# Altium PCB develer_2L_Ax_panel.PcbDoc
Units mm, origin at the board's own origin, x right, y up, seen from the top; angles counter-clockwise.
Board outline 129 x 103 mm, 6 copper layers (Top Layer, GND, Inner, Inner2, Power, Bottom Layer), stack 0.815 mm thick; 6 components, 77 nets, 10 pads, 0 vias.
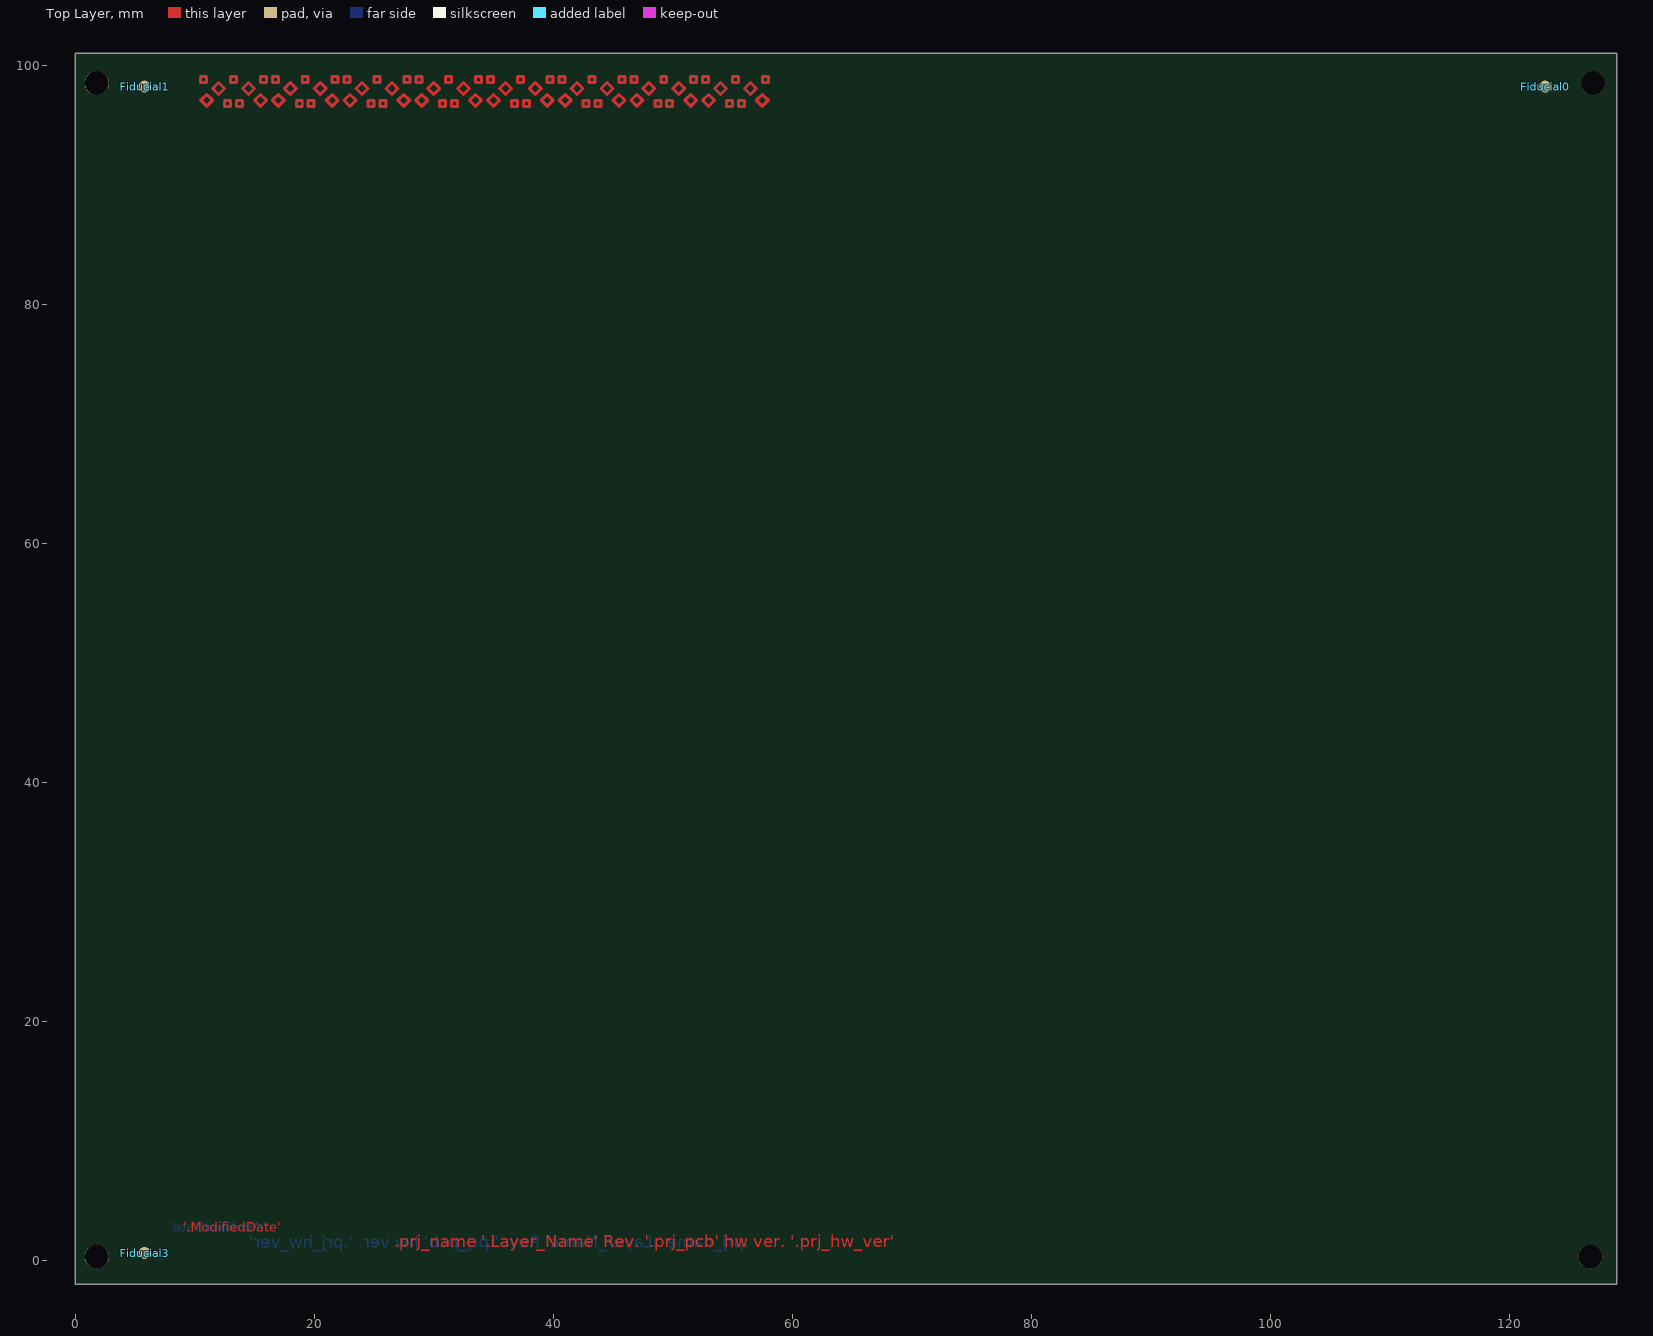
[diagram p0: Top Layer view]
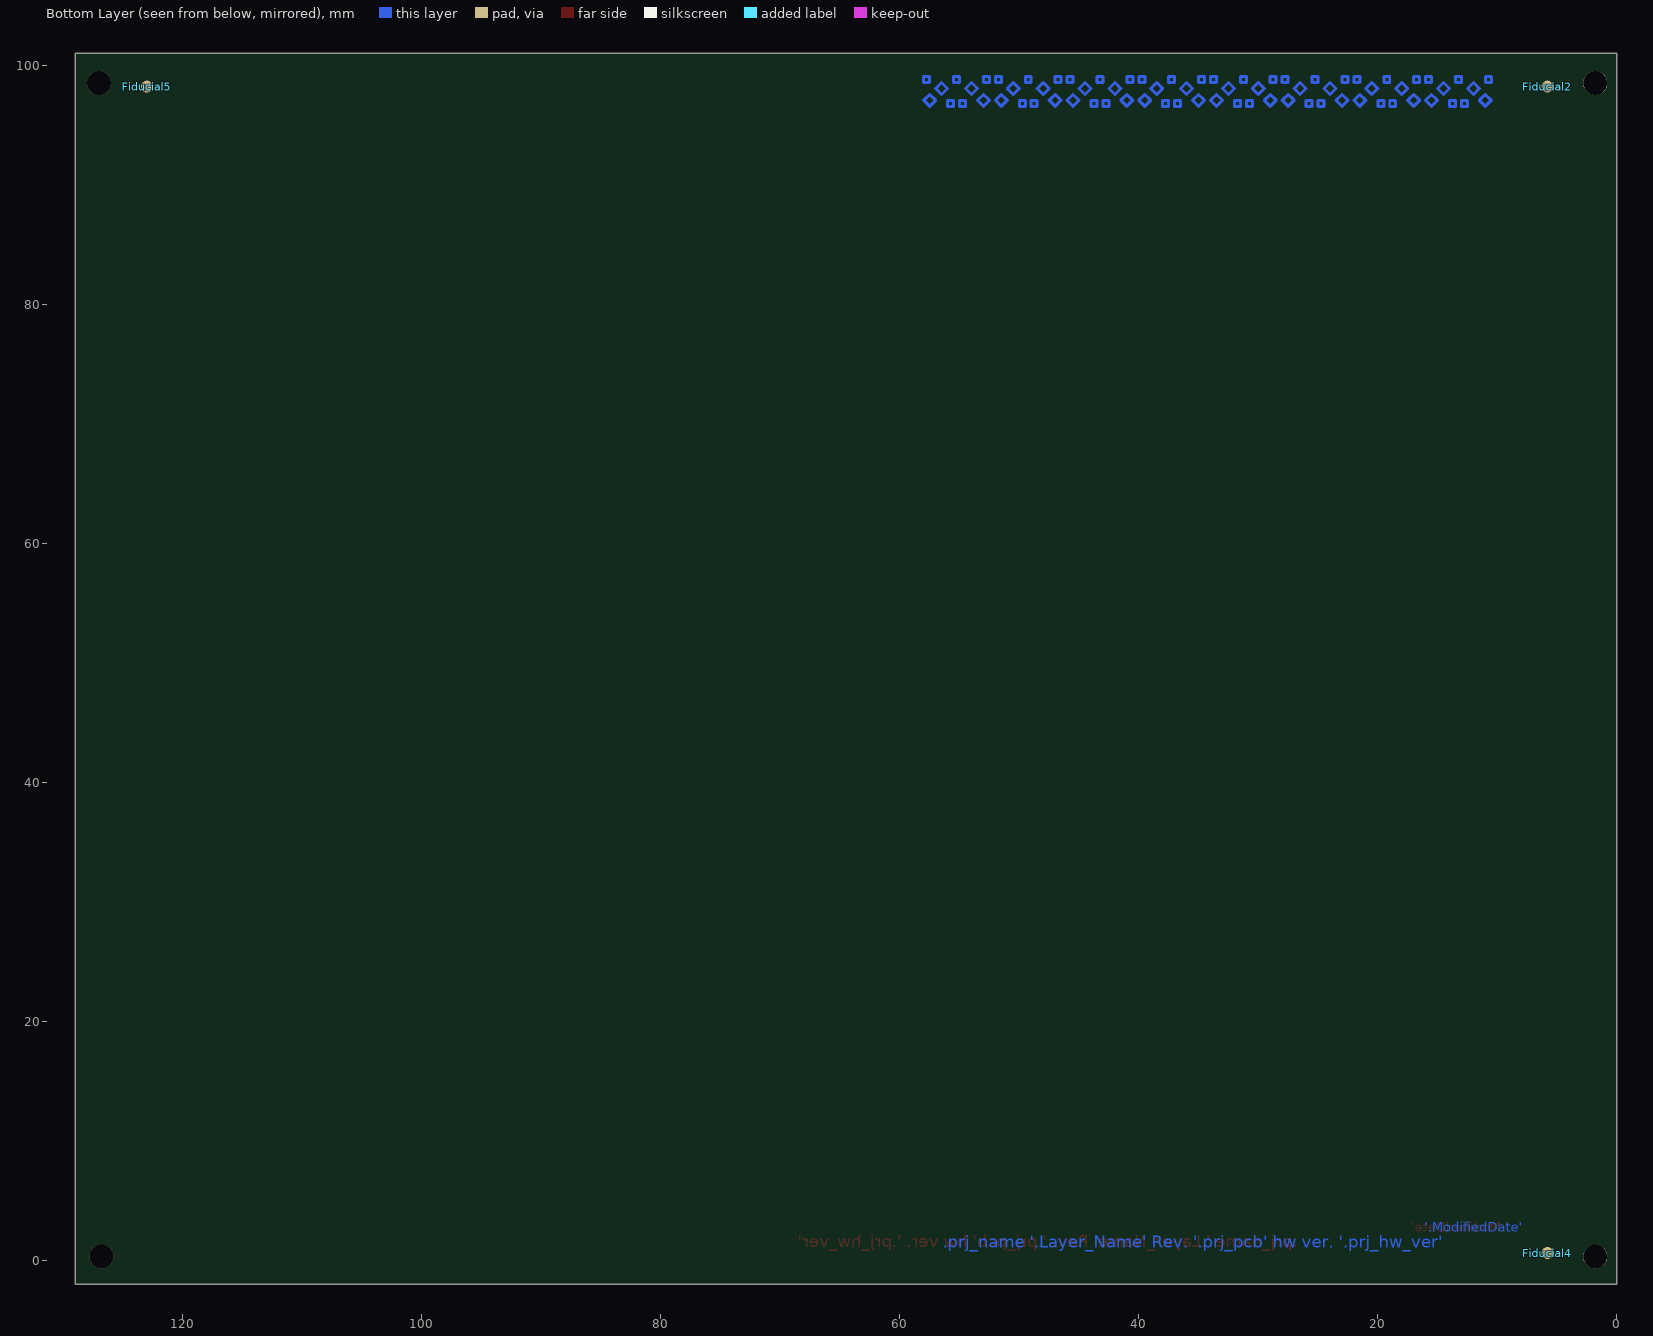
[diagram p1: Bottom Layer view, seen from below]
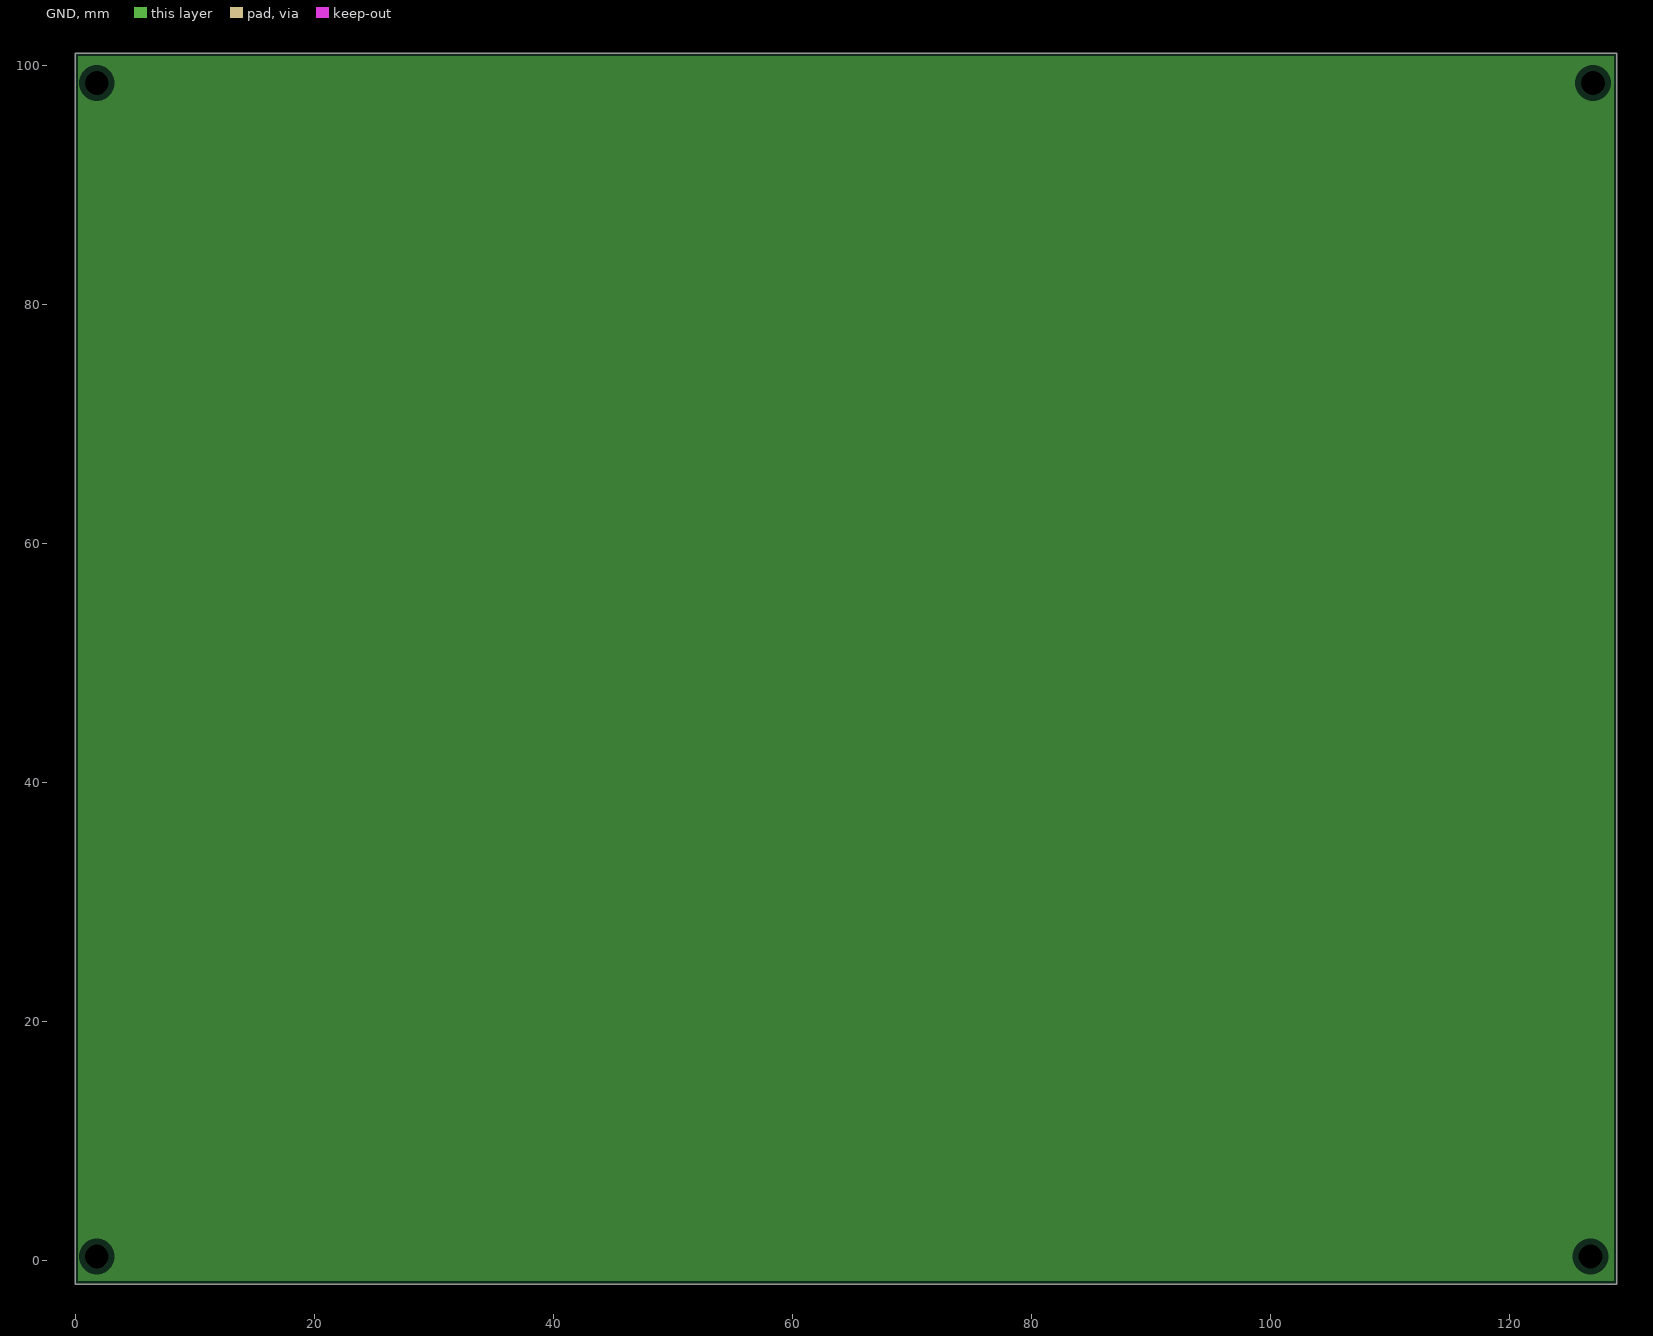
[diagram p2: GND, clearances drawn from the general rule]
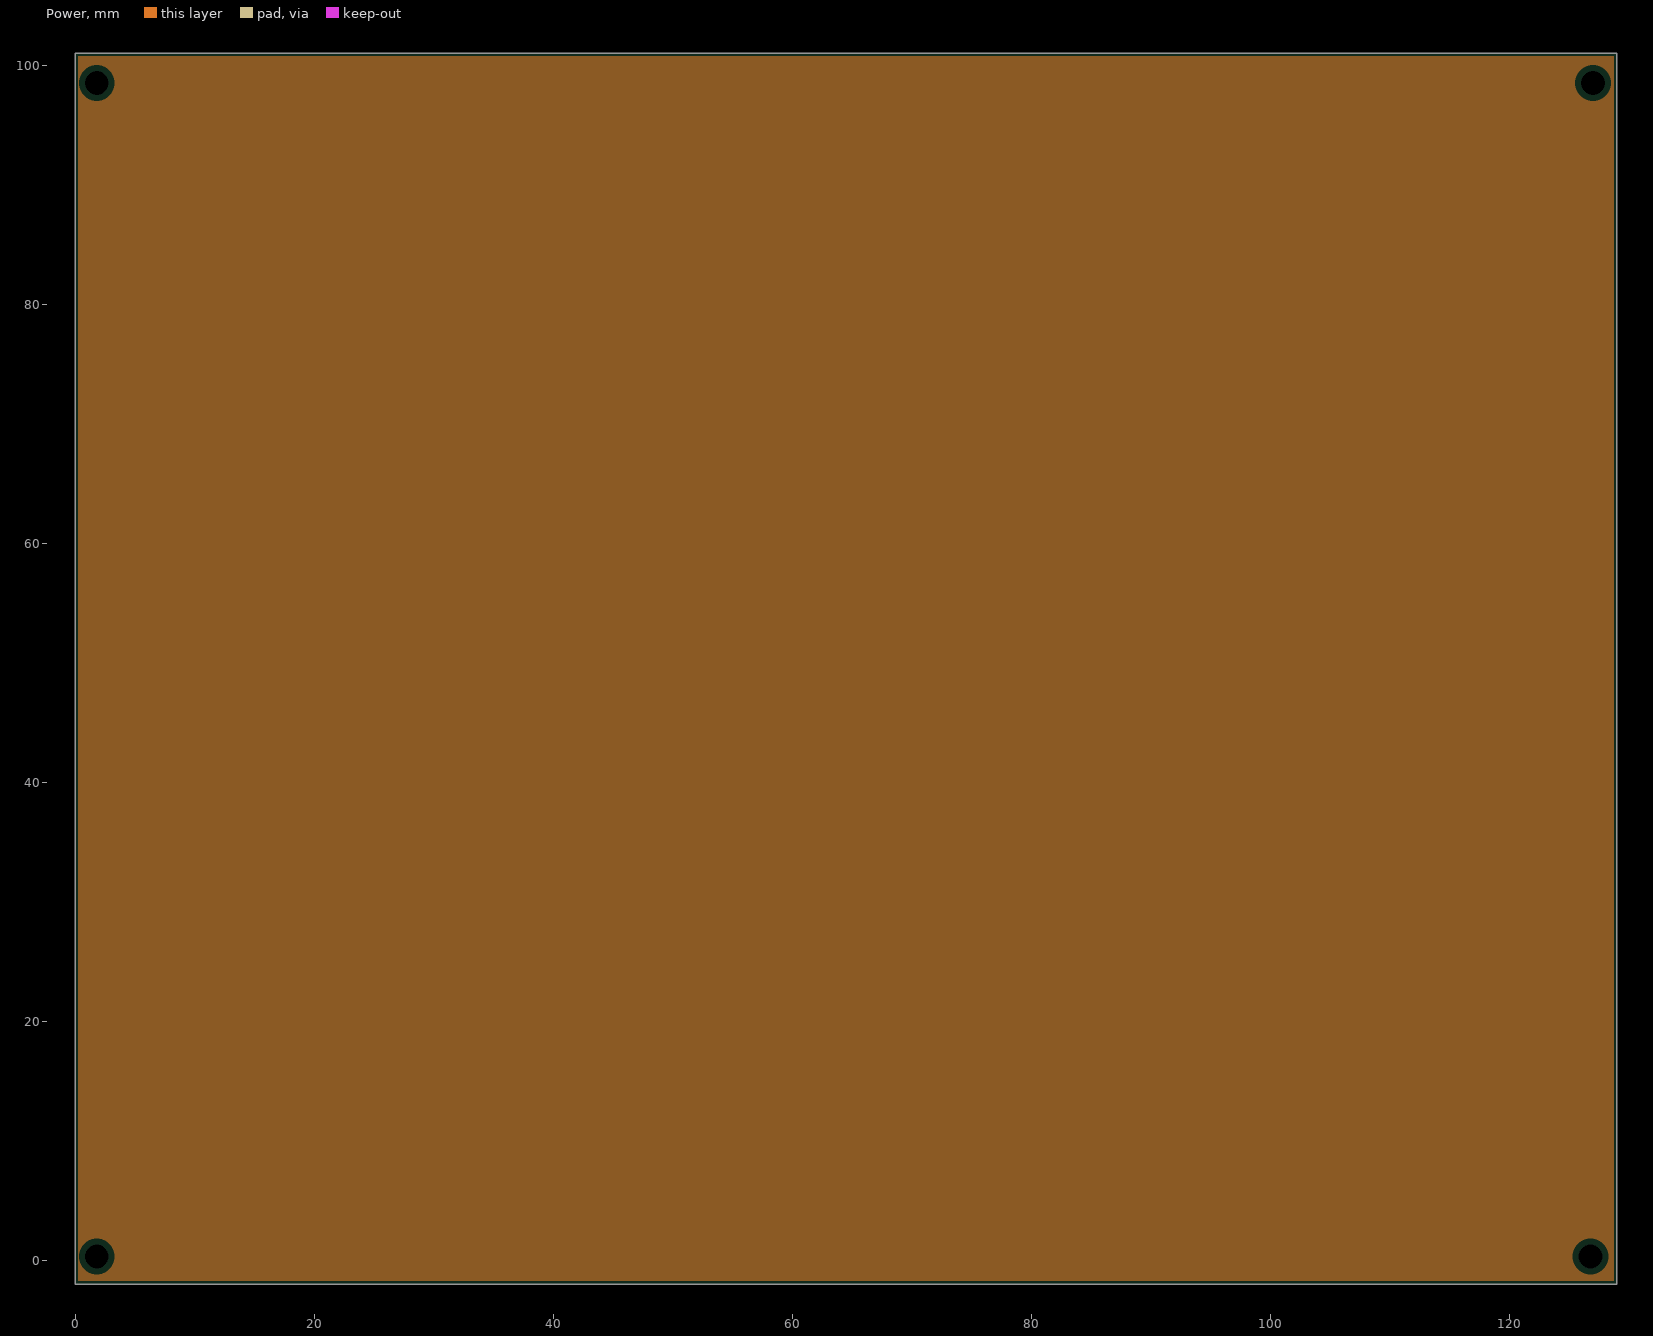
[diagram p3: Power, clearances drawn from the general rule]

## Layer stack, top to bottom
Top Solder: solder mask 0.0102, Solder Resist, Dk 3.5
Top Layer: signal copper 0.035
Dielectric1: prepreg 0.1042, IT180A 3310, Dk 4.15
GND: plane copper 0.018, net (Multiple Nets)
Dielectric5: core 0.13, IT180A FR-4, Dk 4.25
Inner: signal copper 0.018
Dielectric3: prepreg 0.2043, IT180A 3310, Dk 4.15
Inner2: signal copper 0.018
Dielectric2: core 0.13, IT180A FR-4, Dk 4.25
Power: plane copper 0.018, net (Multiple Nets)
Dielectric4: prepreg 0.1042, IT180A 3310, Dk 4.15
Bottom Layer: signal copper 0.035
Bottom Solder: solder mask 0.0102, Solder Resist, Dk 3.5

## Board outline
0,-2 0,101 129,101 129,-2

## Design rules (kind name [scope] priority, off if disabled: settings)
Clearance Clearance_eth_hole [(ObjectKind = 'Pad') And ((Name = 'J1-MH1') or (Name = 'J1-MH2'))] p1: gap=0 ignorepadtopadclearanceinfootprint=FALSE
Clearance Clearance_shld [InNet('SHLD') and InPolygon] p2: gap=0.9 ignorepadtopadclearanceinfootprint=FALSE
Clearance Clearance_gnd_planes [InPolygon and InNet('GND')] p3: gap=0.45 ignorepadtopadclearanceinfootprint=FALSE
Clearance Clearance_poe_vin [InNetClass('poe_vin') vs InPolygon] p4: gap=0.85 ignorepadtopadclearanceinfootprint=FALSE
Clearance Clearance_015 [InComponentClass('015')] p5: gap=0.15 ignorepadtopadclearanceinfootprint=FALSE
Clearance Clearance_diff_eth [InDifferentialPairClass('eth') vs not OnLayer('Keep-Out Layer')] p6: gap=0.35 ignorepadtopadclearanceinfootprint=FALSE except(0.45: Arc-Fill Arc-Poly Arc-Region Track-Fill Track-Poly Track-Region SMDPad-Fill SMDPad-Poly SMDPad-Region THPad-Fill THPad-Poly THPad-Region Via-Fill Via-Poly Via-Region Fill-Fill Fill-Poly Fill-Region Poly-Poly Poly-Region Region-Region)
Clearance Clearance_diff_eth_same [InDifferentialPairClass('eth')] p7: gap=0.15 ignorepadtopadclearanceinfootprint=FALSE
Clearance Clearance_diff_usb_same [InDifferentialPairClass('usb')] p8: gap=0.2 ignorepadtopadclearanceinfootprint=FALSE
Clearance [All vs not InAnyDifferentialPair] p9: gap=0.25 ignorepadtopadclearanceinfootprint=FALSE
ComponentClearance ComponentClearance_con [InComponent('J2') vs InComponent('J3')] p1: gap=0 collisioncheckmode=3 verticalgap=0 showdistances=FALSE
ComponentClearance ComponentClearance_con_1 [InComponent('J4') vs InComponent('J5')] p2: gap=0 collisioncheckmode=3 verticalgap=0 showdistances=FALSE
ComponentClearance ComponentClearance_con_2 [InComponent('J8') vs InComponent('J4')] p3: gap=0 collisioncheckmode=3 verticalgap=0 showdistances=FALSE
ComponentClearance ComponentClearance_logo [HasFootprint('Develer_logo_30x12mm_PCB_NOTE') vs HasFootprint('Develer_logo_30x12mm_TB_Top')] p4: gap=0 collisioncheckmode=3 verticalgap=0 showdistances=FALSE
ComponentClearance [All] p5: gap=0.25 collisioncheckmode=3 verticalgap=0.25 showdistances=FALSE
DiffPairsRouting DiffPairsRouting_eth [InDifferentialPair('ETHCONN-RX', 'ETHCONN-TX')] p1: maxlimit=0.15 minlimit=0.15 mostfreqgap=0.15 toplayer_minwidth=0.16 toplayer_maxwidth=0.16 toplayer_prefwidth=0.16 midlayer1_minwidth=0.16 midlayer1_maxwidth=0.16 midlayer1_prefwidth=0.16 midlayer2_minwidth=0.16 midlayer2_maxwidth=0.16 midlayer2_prefwidth=0.16 bottomlayer_minwidth=0.16 bottomlayer_maxwidth=0.16 bottomlayer_prefwidth=0.16 maxuncoupledlength=12.7
DiffPairsRouting DiffPairsRouting_eth_1 [InDifferentialPair('ETHRX', 'ETHTX')] p2: maxlimit=0.15 minlimit=0.15 mostfreqgap=0.15 toplayer_minwidth=0.16 toplayer_maxwidth=0.16 toplayer_prefwidth=0.16 midlayer1_minwidth=0.16 midlayer1_maxwidth=0.16 midlayer1_prefwidth=0.16 midlayer2_minwidth=0.16 midlayer2_maxwidth=0.16 midlayer2_prefwidth=0.16 bottomlayer_minwidth=0.16 bottomlayer_maxwidth=0.16 bottomlayer_prefwidth=0.16 maxuncoupledlength=12.7
DiffPairsRouting DiffPairsRouting_usb [InDifferentialPair('USBA', 'usbb')] p3: maxlimit=0.35 minlimit=0.2 mostfreqgap=0.2 toplayer_minwidth=0.22 toplayer_maxwidth=0.22 toplayer_prefwidth=0.22 midlayer1_minwidth=0.22 midlayer1_maxwidth=0.22 midlayer1_prefwidth=0.22 midlayer2_minwidth=0.22 midlayer2_maxwidth=0.22 midlayer2_prefwidth=0.22 bottomlayer_minwidth=0.22 bottomlayer_maxwidth=0.22 bottomlayer_prefwidth=0.22 maxuncoupledlength=2.7
Height [All] p1: minheight=0 maxheight=25 prefheight=12.5
HoleSize [All] p1: absolutevalues=TRUE maxlimit=10 minlimit=0.2 maxpercent=80.000 minpercent=20.000
HoleToHoleClearance [All] p1: gap=0.25 allowstackedmicrovias=TRUE
MatchedLengths MatchedLengths_usb [InDifferentialPair('USBA', 'usbb')] p1: tolerance=0.25 checknetsindiffpair=TRUE checkdiffpairvsdiffpair=FALSE checkxsignals=FALSE checkothers=FALSE
MatchedLengths MatchedLengths_eth [InDifferentialPair('ETHCONN-RX', 'ETHCONN-TX')] p2: tolerance=0.25 checknetsindiffpair=FALSE checkdiffpairvsdiffpair=TRUE checkxsignals=TRUE checkothers=TRUE
MatchedLengths MatchedLengths_eth_2 [InDifferentialPair('ETHRX', 'ETHTX')] p3: tolerance=0.25 checknetsindiffpair=FALSE checkdiffpairvsdiffpair=TRUE checkxsignals=TRUE checkothers=TRUE
MatchedLengths MatchedLengths_eth_1 [InDifferentialPair('ETHCONN-RX', 'ETHCONN-TX')] p4: tolerance=0.2 checknetsindiffpair=TRUE checkdiffpairvsdiffpair=FALSE checkxsignals=FALSE checkothers=FALSE
MatchedLengths MatchedLengths_eth_3 [InDifferentialPair('ETHRX', 'ETHTX')] p5: tolerance=0.2 checknetsindiffpair=TRUE checkdiffpairvsdiffpair=FALSE checkxsignals=FALSE checkothers=FALSE
MinimumSolderMaskSliver MinimumSolderMaskSliver_firma [HasFootprint('db_firma')] p1: minsoldermaskwidth=0
MinimumSolderMaskSliver [All] p2: minsoldermaskwidth=0.1
PlaneClearance PlaneClearance_poe_vin [InNetClass('poe_vin')] p1: clearance=0.65
PlaneClearance [All] p2: clearance=0.5
PlaneConnect PlaneConnect_poe [(ObjectKind = 'Pad') And (Name = 'U1-21')] p1: planeconnectstyle=Direct reliefexpansion=0.508 reliefentries=4 reliefconductorwidth=0.254 reliefairgap=0.254
PlaneConnect PlaneConnect_via [isvia] p2: planeconnectstyle=Direct reliefexpansion=0.508 reliefentries=4 reliefconductorwidth=0.254 reliefairgap=0.254
PlaneConnect [All] p3: planeconnectstyle=Relief reliefexpansion=0.3 reliefentries=4 reliefconductorwidth=0.3 reliefairgap=0.15
PolygonConnect PolygonConnect_1 [(ObjectKind = 'Pad') And (Name = 'U1-21')] p1: connectstyle=Direct reliefconductorwidth=0.254 reliefentries=4 polygonreliefangle="90 Angle" airgapwidth=0.254
PolygonConnect PolygonConnect_via [isvia] p2: connectstyle=Direct reliefconductorwidth=0.254 reliefentries=4 polygonreliefangle="90 Angle" airgapwidth=0.254
PolygonConnect [All] p3: connectstyle=Relief reliefconductorwidth=0.15 reliefentries=4 polygonreliefangle="90 Angle" airgapwidth=0.15
RoutingCorners [All] p1: cornerstyle=45-Degree minsetback=2.5 maxsetback=2.5
RoutingVias [All] p1: holewidth=0.3 width=0.6 viastyle="Through Hole" minholewidth=0.2 minwidth=0.3 maxholewidth=0.5 maxwidth=1
ShortCircuit ShortCircuit_eth_hole [(ObjectKind = 'Pad') And ((Name = 'J1-MH1') or (Name = 'J1-MH2'))] p1: allowed=TRUE
ShortCircuit [All] p2: allowed=FALSE
SilkToSilkClearance [All] p1: silktosilkclearance=0.15
SilkToSolderMaskClearance [IsPad] p1: minsilkscreentomaskgap=0.15 clearancetoexposedcopper=TRUE
SolderMaskExpansion SolderMaskExpansion_via [isVia] p1: expansion=-10 istentingtop=FALSE
SolderMaskExpansion [All] p2: expansion=0.05 istentingtop=FALSE
UnRoutedNet [All] p1: checkbadconnections=TRUE
Width [All] p1: maxlimit=5 minlimit=0.15 preferedwidth=0.25
17 further rules are at their usual default settings.

## Classes and differential pairs
net class diffpair: ETH_VDDA ETHCONN-RX_N ETHCONN-RX_P ETHCONN-TX_N ETHCONN-TX_P ETHRX_N ETHRX_P ETHTX_N ETHTX_P NetC27_2 NetC28_2 USBA_N USBA_P USBB_N USBB_P
net class poe_vin: CT1VC+ CT2VC- SP1VC+ SP2VC-
differential pair class usb: USBA USBB
differential pair class eth: ETHCONN-RX ETHCONN-TX ETHRX ETHTX
net class usb_diff: USBA_N USBA_P USBB_N USBB_P
component class usb: U?
differential pair ETHTX: +ETHTX_P -ETHTX_N
differential pair ETHRX: +ETHRX_P -ETHRX_N
differential pair USBB: +USBB_P -USBB_N
differential pair USBA: +USBA_P -USBA_N
differential pair ETHCONN-TX: +ETHCONN-TX_P -ETHCONN-TX_N
differential pair ETHCONN-RX: +ETHCONN-RX_P -ETHCONN-RX_N

## Components (designator, comment, footprint, x,y, rotation, side; value= is the part's Value field where it differs from the comment)
Fiducial0 "Comment" Fiducial_mark_nosilk 123,98.2 r0 top
Fiducial1 "Comment" Fiducial_mark_nosilk 5.8,98.2 r0 top
Fiducial2 "Comment" Fiducial_mark_nosilk 5.8,98.2 r0 bottom
Fiducial3 "Comment" Fiducial_mark_nosilk 5.8,0.6 r0 top
Fiducial4 "Comment" Fiducial_mark_nosilk 5.8,0.6 r0 bottom
Fiducial5 "Comment" Fiducial_mark_nosilk 123,98.2 r0 bottom

## Footprints (in the part's own frame and the unit in brackets; to place one, negate y for a bottom-side part, rotate by r counter-clockwise, add the part's x,y. Pads: shape width x height; smd on the part's side, far side on the other; paste and mask are expansions set on the pad)
Fiducial_mark_nosilk [mm]
  round 1 smd mask+1: "Fiducial Mark"(0,0)

## Free pads (board coordinates)
  round 2 hole 2: hole(1.8,0.3) hole(1.8,98.5) hole(126.8,0.3) hole(127,98.5)

## Nets (pads, with @x,y where several pads share a name; then routed paths per layer and width w, separated by ;. In a path a pad name is that pad's centre, name@x,y a point inside that pad or via, vN(x,y) a via of type N, cw(c..) or ccw(c..) an arc to the next point about the centre after c; other vN are vias at no path point)
CT1VC+: 
CT2VC-: 
ETH_VDD: 
ETH_VDDA: 
ETHCONN-RX_N: 
ETHCONN-RX_P: 
ETHCONN-TX_N: 
ETHCONN-TX_P: 
ETHRX_N: 
ETHRX_P: 
ETHTX_N: 
ETHTX_P: 
FB: 
GND: 
LED_ACT: 
LED_LINK: 
NetC5_2: 
NetC7_2: 
NetC9_2: 
NetC10_2: 
NetC11_2: 
NetC25_1: 
NetC25_2: 
NetC26_1: 
NetC26_2: 
NetC27_1: 
NetC27_2: 
NetC28_1: 
NetC28_2: 
NetD1_1: 
NetD3_1: 
NetD4_2: 
NetD5_2: 
NetJ2_3: 
NetJ2_4: 
NetJ2_5: 
NetJ2_6: 
NetJ2_7: 
NetJ2_8: 
NetJ2_9: 
NetJ2_10: 
NetJ2_11: 
NetJ2_12: 
NetJ2_13: 
NetJ2_14: 
NetJ3_1: 
NetJ3_2: 
NetJ3_3: 
NetJ3_4: 
NetJ3_5: 
NetJ3_6: 
NetJ3_7: 
NetJ3_8: 
NetJ4_4: 
NetJ4_6: 
NetJ4_10: 
NetJ7_2: 
NetJ7_3: 
NetL11_2: 
NetR7_1: 
NetR9_2: 
NetR11_2: 
NetR24_2: 
SHLD: 
SP1VC+: 
SP2VC-: 
SWO: 
to_shield: 
USBA_N: 
USBA_P: 
USBB_N: 
USBB_P: 
VDD_BUS: 
Vneg: 
Vpos: 
Vss: 
VSYS_5V: 
pads on no net: "Fiducial0.Fiducial Mark" "Fiducial1.Fiducial Mark" "Fiducial2.Fiducial Mark" "Fiducial3.Fiducial Mark" "Fiducial4.Fiducial Mark" "Fiducial5.Fiducial Mark"
copper on no net: | length 341
  Top Layer w0.25: 10.5,97.052 11,97.552 11.5,97.052 11,96.552 10.5,97.052 ; 10.5,98.552 10.5,99.052 11,99.052 11,98.552 10.5,98.552 ; 11.5,98.052 12,98.552 12.5,98.052 12,97.552 11.5,98.052 ; 12.5,96.552 13,96.552 13,97.052 12.5,97.052 12.5,96.552 ; 13,98.552 13.5,98.552 13.5,99.052 13,99.052 13,98.552 ; 13.5,96.552 13.5,97.052 14,97.052 14,96.552 13.5,96.552 ; 14,98.052 14.5,97.552 15,98.052 14.5,98.552 14,98.052 ; 15,97.052 15.5,96.552 16,97.052 15.5,97.552 15,97.052 ; 15.5,98.552 15.5,99.052 16,99.052 16,98.552 15.5,98.552 ; 16.5,97.052 17,96.552 17.5,97.052 17,97.552 16.5,97.052 ; 16.5,98.552 17,98.552 17,99.052 16.5,99.052 16.5,98.552 ; 17.5,98.052 18,97.552 18.5,98.052 18,98.552 17.5,98.052 ; 18.5,96.552 18.5,97.052 19,97.052 19,96.552 18.5,96.552 ; 19,98.552 19,99.052 19.5,99.052 19.5,98.552 19,98.552 ; 19.5,96.552 20,96.552 20,97.052 19.5,97.052 19.5,96.552 ; 20,98.052 20.5,98.552 21,98.052 20.5,97.552 20,98.052 ; 21,97.052 21.5,97.552 22,97.052 21.5,96.552 21,97.052 ; 21.5,98.552 22,98.552 22,99.052 21.5,99.052 21.5,98.552 ; 22.5,97.052 23,96.552 23.5,97.052 23,97.552 22.5,97.052 ; 22.5,98.552 23,98.552 23,99.052 22.5,99.052 22.5,98.552 ; 23.5,98.052 24,97.552 24.5,98.052 24,98.552 23.5,98.052 ; 24.5,96.552 24.5,97.052 25,97.052 25,96.552 24.5,96.552 ; 25,98.552 25,99.052 25.5,99.052 25.5,98.552 25,98.552 ; 25.5,96.552 26,96.552 26,97.052 25.5,97.052 25.5,96.552 ; 26,98.052 26.5,98.552 27,98.052 26.5,97.552 26,98.052 ; 27,97.052 27.5,97.552 28,97.052 27.5,96.552 27,97.052 ; 27.5,98.552 28,98.552 28,99.052 27.5,99.052 27.5,98.552 ; 28.5,97.052 29,96.552 29.5,97.052 29,97.552 28.5,97.052 ; 28.5,98.552 29,98.552 29,99.052 28.5,99.052 28.5,98.552 ; 29.5,98.052 30,97.552 30.5,98.052 30,98.552 29.5,98.052 ; 30.5,96.552 30.5,97.052 31,97.052 31,96.552 30.5,96.552 ; 31,98.552 31,99.052 31.5,99.052 31.5,98.552 31,98.552 ; 31.5,96.552 32,96.552 32,97.052 31.5,97.052 31.5,96.552 ; 32,98.052 32.5,98.552 33,98.052 32.5,97.552 32,98.052 ; 33,97.052 33.5,97.552 34,97.052 33.5,96.552 33,97.052 ; 33.5,98.552 34,98.552 34,99.052 33.5,99.052 33.5,98.552 ; 34.5,97.052 35,96.552 35.5,97.052 35,97.552 34.5,97.052 ; 34.5,98.552 35,98.552 35,99.052 34.5,99.052 34.5,98.552 ; 35.5,98.052 36,97.552 36.5,98.052 36,98.552 35.5,98.052 ; 36.5,96.552 36.5,97.052 37,97.052 37,96.552 36.5,96.552 ; 37,98.552 37,99.052 37.5,99.052 37.5,98.552 37,98.552 ; 37.5,96.552 38,96.552 38,97.052 37.5,97.052 37.5,96.552 ; 38,98.052 38.5,98.552 39,98.052 38.5,97.552 38,98.052 ; 39,97.052 39.5,97.552 40,97.052 39.5,96.552 39,97.052 ; 39.5,98.552 40,98.552 40,99.052 39.5,99.052 39.5,98.552 ; 40.5,97.052 41,96.552 41.5,97.052 41,97.552 40.5,97.052 ; 40.5,98.552 41,98.552 41,99.052 40.5,99.052 40.5,98.552 ; 41.5,98.052 42,97.552 42.5,98.052 42,98.552 41.5,98.052 ; 42.5,96.552 42.5,97.052 43,97.052 43,96.552 42.5,96.552 ; 43,98.552 43,99.052 43.5,99.052 43.5,98.552 43,98.552 ; 43.5,96.552 44,96.552 44,97.052 43.5,97.052 43.5,96.552 ; 44,98.052 44.5,98.552 45,98.052 44.5,97.552 44,98.052 ; 45,97.052 45.5,97.552 46,97.052 45.5,96.552 45,97.052 ; 45.5,98.552 46,98.552 46,99.052 45.5,99.052 45.5,98.552 ; 46.5,97.052 47,96.552 47.5,97.052 47,97.552 46.5,97.052 ; 46.5,98.552 47,98.552 47,99.052 46.5,99.052 46.5,98.552 ; 47.5,98.052 48,97.552 48.5,98.052 48,98.552 47.5,98.052 ; 48.5,96.552 48.5,97.052 49,97.052 49,96.552 48.5,96.552 ; 49,98.552 49,99.052 49.5,99.052 49.5,98.552 49,98.552 ; 49.5,96.552 50,96.552 50,97.052 49.5,97.052 49.5,96.552 ; 50,98.052 50.5,98.552 51,98.052 50.5,97.552 50,98.052 ; 51,97.052 51.5,97.552 52,97.052 51.5,96.552 51,97.052 ; 51.5,98.552 52,98.552 52,99.052 51.5,99.052 51.5,98.552 ; 52.5,97.052 53,96.552 53.5,97.052 53,97.552 52.5,97.052 ; 52.5,98.552 53,98.552 53,99.052 52.5,99.052 52.5,98.552 ; 53.5,98.052 54,97.552 54.5,98.052 54,98.552 53.5,98.052 ; 54.5,96.552 54.5,97.052 55,97.052 55,96.552 54.5,96.552 ; 55,98.552 55,99.052 55.5,99.052 55.5,98.552 55,98.552 ; 55.5,96.552 56,96.552 56,97.052 55.5,97.052 55.5,96.552 ; 56,98.052 56.5,98.552 57,98.052 56.5,97.552 56,98.052 ; 57,97.052 57.5,97.552 58,97.052 57.5,96.552 57,97.052 ; 57.5,98.552 58,98.552 58,99.052 57.5,99.052 57.5,98.552
  Bottom Layer w0.25: 10.5,97.052 11,96.552 11.5,97.052 11,97.552 10.5,97.052 ; 10.5,98.552 10.5,99.052 11,99.052 11,98.552 10.5,98.552 ; 11.5,98.052 12,98.552 12.5,98.052 12,97.552 11.5,98.052 ; 12.5,96.552 13,96.552 13,97.052 12.5,97.052 12.5,96.552 ; 13,98.552 13,99.052 13.5,99.052 13.5,98.552 13,98.552 ; 13.5,96.552 14,96.552 14,97.052 13.5,97.052 13.5,96.552 ; 14,98.052 14.5,98.552 15,98.052 14.5,97.552 14,98.052 ; 15,97.052 15.5,97.552 16,97.052 15.5,96.552 15,97.052 ; 15.5,98.552 16,98.552 16,99.052 15.5,99.052 15.5,98.552 ; 16.5,97.052 17,97.552 17.5,97.052 17,96.552 16.5,97.052 ; 16.5,98.552 17,98.552 17,99.052 16.5,99.052 16.5,98.552 ; 17.5,98.052 18,97.552 18.5,98.052 18,98.552 17.5,98.052 ; 18.5,96.552 18.5,97.052 19,97.052 19,96.552 18.5,96.552 ; 19,98.552 19.5,98.552 19.5,99.052 19,99.052 19,98.552 ; 19.5,96.552 19.5,97.052 20,97.052 20,96.552 19.5,96.552 ; 20,98.052 20.5,97.552 21,98.052 20.5,98.552 20,98.052 ; 21,97.052 21.5,96.552 22,97.052 21.5,97.552 21,97.052 ; 21.5,98.552 21.5,99.052 22,99.052 22,98.552 21.5,98.552 ; 22.5,97.052 23,97.552 23.5,97.052 23,96.552 22.5,97.052 ; 22.5,98.552 23,98.552 23,99.052 22.5,99.052 22.5,98.552 ; 23.5,98.052 24,97.552 24.5,98.052 24,98.552 23.5,98.052 ; 24.5,96.552 24.5,97.052 25,97.052 25,96.552 24.5,96.552 ; 25,98.552 25.5,98.552 25.5,99.052 25,99.052 25,98.552 ; 25.5,96.552 25.5,97.052 26,97.052 26,96.552 25.5,96.552 ; 26,98.052 26.5,97.552 27,98.052 26.5,98.552 26,98.052 ; 27,97.052 27.5,96.552 28,97.052 27.5,97.552 27,97.052 ; 27.5,98.552 27.5,99.052 28,99.052 28,98.552 27.5,98.552 ; 28.5,97.052 29,97.552 29.5,97.052 29,96.552 28.5,97.052 ; 28.5,98.552 29,98.552 29,99.052 28.5,99.052 28.5,98.552 ; 29.5,98.052 30,97.552 30.5,98.052 30,98.552 29.5,98.052 ; 30.5,96.552 30.5,97.052 31,97.052 31,96.552 30.5,96.552 ; 31,98.552 31.5,98.552 31.5,99.052 31,99.052 31,98.552 ; 31.5,96.552 31.5,97.052 32,97.052 32,96.552 31.5,96.552 ; 32,98.052 32.5,97.552 33,98.052 32.5,98.552 32,98.052 ; 33,97.052 33.5,96.552 34,97.052 33.5,97.552 33,97.052 ; 33.5,98.552 33.5,99.052 34,99.052 34,98.552 33.5,98.552 ; 34.5,97.052 35,97.552 35.5,97.052 35,96.552 34.5,97.052 ; 34.5,98.552 35,98.552 35,99.052 34.5,99.052 34.5,98.552 ; 35.5,98.052 36,97.552 36.5,98.052 36,98.552 35.5,98.052 ; 36.5,96.552 36.5,97.052 37,97.052 37,96.552 36.5,96.552 ; 37,98.552 37.5,98.552 37.5,99.052 37,99.052 37,98.552 ; 37.5,96.552 37.5,97.052 38,97.052 38,96.552 37.5,96.552 ; 38,98.052 38.5,97.552 39,98.052 38.5,98.552 38,98.052 ; 39,97.052 39.5,96.552 40,97.052 39.5,97.552 39,97.052 ; 39.5,98.552 39.5,99.052 40,99.052 40,98.552 39.5,98.552 ; 40.5,97.052 41,97.552 41.5,97.052 41,96.552 40.5,97.052 ; 40.5,98.552 41,98.552 41,99.052 40.5,99.052 40.5,98.552 ; 41.5,98.052 42,97.552 42.5,98.052 42,98.552 41.5,98.052 ; 42.5,96.552 42.5,97.052 43,97.052 43,96.552 42.5,96.552 ; 43,98.552 43.5,98.552 43.5,99.052 43,99.052 43,98.552 ; 43.5,96.552 43.5,97.052 44,97.052 44,96.552 43.5,96.552 ; 44,98.052 44.5,97.552 45,98.052 44.5,98.552 44,98.052 ; 45,97.052 45.5,96.552 46,97.052 45.5,97.552 45,97.052 ; 45.5,98.552 45.5,99.052 46,99.052 46,98.552 45.5,98.552 ; 46.5,97.052 47,97.552 47.5,97.052 47,96.552 46.5,97.052 ; 46.5,98.552 47,98.552 47,99.052 46.5,99.052 46.5,98.552 ; 47.5,98.052 48,97.552 48.5,98.052 48,98.552 47.5,98.052 ; 48.5,96.552 48.5,97.052 49,97.052 49,96.552 48.5,96.552 ; 49,98.552 49.5,98.552 49.5,99.052 49,99.052 49,98.552 ; 49.5,96.552 49.5,97.052 50,97.052 50,96.552 49.5,96.552 ; 50,98.052 50.5,97.552 51,98.052 50.5,98.552 50,98.052 ; 51,97.052 51.5,96.552 52,97.052 51.5,97.552 51,97.052 ; 51.5,98.552 51.5,99.052 52,99.052 52,98.552 51.5,98.552 ; 52.5,97.052 53,97.552 53.5,97.052 53,96.552 52.5,97.052 ; 52.5,98.552 53,98.552 53,99.052 52.5,99.052 52.5,98.552 ; 53.5,98.052 54,97.552 54.5,98.052 54,98.552 53.5,98.052 ; 54.5,96.552 54.5,97.052 55,97.052 55,96.552 54.5,96.552 ; 55,98.552 55.5,98.552 55.5,99.052 55,99.052 55,98.552 ; 55.5,96.552 55.5,97.052 56,97.052 56,96.552 55.5,96.552 ; 56,98.052 56.5,97.552 57,98.052 56.5,98.552 56,98.052 ; 57,97.052 57.5,96.552 58,97.052 57.5,97.552 57,97.052 ; 57.5,98.552 57.5,99.052 58,99.052 58,98.552 57.5,98.552

## Polygon pours and split planes (outlines as drawn)
GND on GND (split plane): 128.748,-1.748 0.252,-1.748 0.252,100.748 128.748,100.748
NetC27_2 on Power (split plane): 128.748,-1.748 0.252,-1.748 0.252,100.748 128.748,100.748

## Other copper
Top Layer:
  text "'.ModifiedDate'" at 9.05,2.386 h0.8
  text ".prj_name '.Layer_Name' Rev. '.prj_pcb' hw ver. '.prj_hw_ver'" at 26.7,1.102 h1
Bottom Layer:
  text "'.ModifiedDate'" at 16.05,2.386 h0.8
  text ".prj_name '.Layer_Name' Rev. '.prj_pcb' hw ver. '.prj_hw_ver'" at 56.4,1.05 h1

## Silkscreen, mask and mechanical layers (free items; w line width, h text height)
Sheet:
  text "'.Layer_Name'" at 364.636,291.908 h5
  text "'.Layer_Name'" at 485.636,-13.092 h5
Drill Drawing:
  lines w0.254: -141.495,-60.523 -140.024,-60.523 -140.024,-59.052 -141.495,-59.052 -141.495,-60.523
  lines w0.35: -142.825,-61.515 -2.788,-61.515 ; -142.825,-58.206 -2.788,-58.206 ; -133.837,-64.825 -133.837,-54.896 ; -127.006,-64.825 -127.006,-54.896 ; -112.05,-64.825 -112.05,-54.896 ; -105.156,-64.825 -105.156,-54.896 ; -95.175,-64.825 -95.175,-54.896 ; -75.895,-64.825 -75.895,-54.896 ; -67.828,-64.825 -67.828,-54.896 ; -57.275,-64.825 -57.275,-54.896 ; -47.872,-64.825 -47.872,-54.896 ; -36.699,-64.825 -36.699,-54.896 ; -20.025,-64.825 -20.025,-54.896 ; -142.825,-64.825 -2.788,-64.825 -2.788,-54.896 -142.825,-54.896 -142.825,-64.825
  text "Symbol" at -140.839,-57.213 h1.92
  text "Count" at -132.844,-57.213 h1.92
  text "Hole Size" at -126.013,-57.213 h1.92
  text "Plated" at -111.057,-57.213 h1.92
  text "Hole Type" at -104.163,-57.213 h1.92
  text "Drill Layer Pair" at -94.182,-57.213 h1.92
  text "Via/Pad" at -74.902,-57.213 h1.92
  text "Pad Shape" at -66.835,-57.213 h1.92
  text "Template" at -56.282,-57.213 h1.92
  text "Description" at -46.879,-57.213 h1.92
  text "Hole Tolerance (+)" at -35.706,-57.213 h1.92
  text "Hole Tolerance (-)" at -19.032,-57.213 h1.92
  text "4" at -132.844,-60.523 h1.6
  text "78,74mil (2,000mm)" at -126.013,-60.523 h1.6
  text "PTH" at -111.057,-60.523 h1.6
  text "Round" at -104.163,-60.523 h1.6
  text "Top Layer - Bottom Layer" at -94.182,-60.523 h1.6
  text "Pad" at -74.902,-60.523 h1.6
  text "Rounded" at -66.835,-60.523 h1.6
  text "c200h200" at -56.282,-60.523 h1.6
  text "4 Total" at -132.844,-63.832 h1.6
PCB_Note_Panel:
  drawing of 693 lines, arcs and shapes, not listed
  text "REV:" at 383.25,480.272 h0.8
  text "DWG. NO." at 358.689,480.193 h0.8
  text "1" at 170.412,479.809 h1.2
  text "2" at 206.287,479.809 h1.2
  text "3" at 242.162,479.809 h1.2
  text "4" at 278.037,479.809 h1.2
  text "5" at 313.912,479.809 h1.2
  text "6" at 349.787,479.809 h1.2
  text "8" at 421.537,479.809 h1.2
  text ".prj_pcb" at 383.5,478.772 h1.27
  text ".PCB_DWG_NO" at 362,478.522 h1.27
  text "T" at 151.305,476.183 h1.2
  text "H" at 152.406,476.183 h1.2
  text "I" at 153.676,476.183 h1.2
  text "S" at 154.184,476.183 h1.2
  text "D" at 155.836,476.183 h1.2
  text "O" at 157.106,476.183 h1.2
  text "C" at 158.503,476.183 h1.2
  text "U" at 159.774,476.183 h1.2
  text "M" at 161.044,476.183 h1.2
  text "E" at 162.526,476.183 h1.2
  text "N" at 163.712,476.183 h1.2
  text "T" at 164.939,476.183 h1.2
  text "A" at 166.549,476.183 h1.2
  text "N" at 167.734,476.183 h1.2
  text "D" at 169.004,476.183 h1.2
  text "T" at 170.741,476.183 h1.2
  text "H" at 171.842,476.183 h1.2
  text "E" at 173.112,476.183 h1.2
  text "D" at 174.763,476.183 h1.2
  text "A" at 176.034,476.183 h1.2
  text "T" at 177.219,476.183 h1.2
  text "A" at 178.278,476.183 h1.2
  text "D" at 179.972,476.183 h1.2
  text "I" at 181.242,476.183 h1.2
  text "S" at 181.708,476.183 h1.2
  text "C" at 182.893,476.183 h1.2
  text "L" at 184.164,476.183 h1.2
  text "O" at 185.137,476.183 h1.2
  text "S" at 186.535,476.183 h1.2
  text "E" at 187.72,476.183 h1.2
  text "D" at 188.906,476.183 h1.2
  text "H" at 190.642,476.183 h1.2
  text "E" at 191.912,476.183 h1.2
  text "R" at 193.098,476.183 h1.2
  text "E" at 194.326,476.183 h1.2
  text "I" at 195.512,476.183 h1.2
  text "N" at 196.02,476.183 h1.2
  text "O" at 197.756,476.183 h1.2
  text "R" at 199.153,476.183 h1.2
  text "REVISIONS" at 383.187,475.355 h1.5
  text "H" at 151.305,474.15 h1.2
  text "E" at 152.575,474.15 h1.2
  text "R" at 153.761,474.15 h1.2
  text "E" at 155.031,474.15 h1.2
  text "W" at 156.174,474.15 h1.2
  text "I" at 157.91,474.15 h1.2
  text "T" at 158.376,474.15 h1.2
  text "H" at 159.477,474.15 h1.2
  text "I" at 161.213,474.15 h1.2
  text "S" at 161.721,474.15 h1.2
  text "T" at 163.373,474.15 h1.2
  text "H" at 164.474,474.15 h1.2
  text "E" at 165.744,474.15 h1.2
  text "P" at 167.395,474.15 h1.2
  text "R" at 168.581,474.15 h1.2
  text "O" at 169.851,474.15 h1.2
  text "P" at 171.224,474.15 h1.2
  text "E" at 172.41,474.15 h1.2
  text "R" at 173.595,474.15 h1.2
  text "T" at 174.823,474.15 h1.2
  text "Y" at 175.924,474.15 h1.2
  text "O" at 177.576,474.15 h1.2
  text "F" at 178.931,474.15 h1.2
  text "A" at 180.54,474.15 h1.2
  text "L" at 181.725,474.15 h1.2
  text "T" at 182.657,474.15 h1.2
  text "I" at 183.758,474.15 h1.2
  text "U" at 184.266,474.15 h1.2
  text "M" at 185.536,474.15 h1.2
  text "L" at 187.484,474.15 h1.2
  text "I" at 188.458,474.15 h1.2
  text "M" at 188.966,474.15 h1.2
  text "I" at 190.406,474.15 h1.2
  text "T" at 190.914,474.15 h1.2
  text "E" at 192.015,474.15 h1.2
  text "D" at 193.201,474.15 h1.2
  text "A" at 194.937,474.15 h1.2
  text "N" at 196.122,474.15 h1.2
  text "D" at 197.393,474.15 h1.2
  text "M" at 199.171,474.15 h1.2
  text "A" at 200.653,474.15 h1.2
  text "Y" at 201.796,474.15 h1.5
  text "ZONE" at 342.928,472.18 h1.5
  text "REV" at 351.31,472.18 h1.5
  text "DATE" at 412.778,472.18 h1.5
  text "B" at 151.305,472.118 h1.2
  text "E" at 152.49,472.118 h1.2
  text "F" at 154.184,472.118 h1.2
  text "R" at 155.285,472.118 h1.2
  text "E" at 156.555,472.118 h1.2
  text "E" at 157.699,472.118 h1.2
  text "L" at 158.884,472.118 h1.2
  text "Y" at 159.858,472.118 h1.2
  text "D" at 161.552,472.118 h1.2
  text "I" at 162.822,472.118 h1.2
  text "S" at 163.288,472.118 h1.2
  text "T" at 164.474,472.118 h1.2
  text "R" at 165.557,472.118 h1.2
  text "I" at 166.785,472.118 h1.2
  text "B" at 167.293,472.118 h1.2
  text "U" at 168.479,472.118 h1.2
  text "T" at 169.749,472.118 h1.2
  text "E" at 170.85,472.118 h1.2
  text "D" at 172.036,472.118 h1.2
  text "I" at 173.772,472.118 h1.2
  text "N" at 174.28,472.118 h1.2
  text "W" at 175.974,472.118 h1.2
  text "H" at 177.71,472.118 h1.2
  text "O" at 178.938,472.118 h1.2
  text "L" at 180.335,472.118 h1.2
  text "E" at 181.309,472.118 h1.2
  text "." at 182.495,472.118 h1.2
  text "N" at 183.468,472.118 h1.2
  text "O" at 184.739,472.118 h1.2
  text "R" at 186.644,472.118 h1.2
  text "I" at 187.872,472.118 h1.2
  text "G" at 188.38,472.118 h1.2
  text "H" at 189.778,472.118 h1.2
  text "T" at 191.006,472.118 h1.2
  text "S" at 192.107,472.118 h1.2
  text "A" at 193.758,472.118 h1.2
  text "R" at 194.944,472.118 h1.2
  text "E" at 196.214,472.118 h1.2
  text "DESCRIPTION" at 377.091,472.053 h1.5
  text "APPROVED" at 425.605,472.053 h1.5
  text "R" at 151.305,470.085 h1.2
  text "E" at 152.575,470.085 h1.2
  text "S" at 153.761,470.085 h1.2
  text "E" at 154.946,470.085 h1.2
  text "R" at 156.132,470.085 h1.2
  text "V" at 157.402,470.085 h1.2
  text "E" at 158.588,470.085 h1.2
  text "D" at 159.774,470.085 h1.2
  text "O" at 161.51,470.085 h1.2
  text "R" at 162.907,470.085 h1.2
  text "E" at 164.685,470.085 h1.2
  text "X" at 165.871,470.085 h1.2
  text "P" at 167.014,470.085 h1.2
  text "R" at 168.2,470.085 h1.2
  text "E" at 169.47,470.085 h1.2
  text "S" at 170.656,470.085 h1.2
  text "S" at 171.842,470.085 h1.2
  text "O" at 173.493,470.085 h1.2
  text "R" at 174.89,470.085 h1.2
  text "I" at 176.626,470.085 h1.2
  text "M" at 177.134,470.085 h1.2
  text "P" at 178.617,470.085 h1.2
  text "L" at 179.802,470.085 h1.2
  text "I" at 180.734,470.085 h1.2
  text "E" at 181.242,470.085 h1.2
  text "D" at 182.427,470.085 h1.2
  text "W" at 184.121,470.085 h1.2
  text "A" at 185.857,470.085 h1.2
  text "R" at 187.043,470.085 h1.2
  text "A" at 188.313,470.085 h1.2
  text "N" at 189.499,470.085 h1.2
  text "T" at 190.727,470.085 h1.2
  text "E" at 191.828,470.085 h1.2
  text "E" at 193.013,470.085 h1.2
  text "G" at 194.569,470.085 h1.2
  text "I" at 195.967,470.085 h1.2
  text "V" at 196.475,470.085 h1.2
  text "E" at 197.66,470.085 h1.2
  text "N" at 198.846,470.085 h1.2
  text "." at 200.074,470.085 h1.5
  text "A" at 352.072,468.751 h1.5
  text "ORIGINAL" at 378.996,468.751 h1.5
  text "A" at 149.287,466.809 h1.2
  text "A" at 440.287,466.809 h1.2
  text "B" at 149.287,441.809 h1.2
  text "B" at 440.287,441.809 h1.2
  text "C" at 149.287,416.809 h1.2
  text "C" at 440.287,416.809 h1.2
  text "D" at 149.287,391.809 h1.2
  text "D" at 440.287,391.809 h1.2
  text "!! DELETE ME !!" at 484,384 h10
  text "E" at 149.287,366.809 h1.2
  text "E" at 440.287,366.809 h1.2
  text "F" at 149.287,341.809 h1.2
  text "F" at 440.287,341.809 h1.2
  text "PROJECT" at 326.44,333.878 h1.2
  text "DATE" at 351.284,333.878 h1.2
  text ".pcb_organization" at 407.647,333.804 h1.2
  text "BOARD:" at 307.812,331.846 h1.2
  text ".pcb_address1" at 407.647,331.518 h1.2
  text ".prj_name" at 309.69,329.814 h1.25
  text ".prj_date" at 347.982,329.814 h1
  text ".pcb_address2" at 407.647,329.232 h1.2
  text "'.pcb_address3' - '.pcb_address4'" at 407.647,326.946 h1.2
  text "STATUS:" at 307.812,326.766 h1.2
  text "-  '.prj_status' -" at 309.74,324.336 h1.5
  text "TITLE:" at 359.768,323.951 h1.2
  text "VARIANT:" at 307.812,321.686 h1.2
  text ".prj_name_long" at 364.086,320.141 h2.54
  text ".VariantName" at 309.69,319.086 h1.25
  text "PART NO." at 272.87,318.894 h1.2
  text ".prj_part_number" at 280.871,318.894 h1.2
  text "DWG. NO." at 440.171,318.207 h0.8 r270
  text "G" at 149.287,316.809 h1.2
  text "UNLESS OTHERWISE SPECIFIED DIMENSIONS" at 273.378,316.227 h1.1
  text "APPROVALS" at 326.44,316.174 h1.2
  text "DATE" at 351.284,316.174 h1.2
  text ".pcb_title1" at 364.086,314.968 h2.54
  text ".PCB_DWG_NO" at 438.5,314.897 h1.27 r270
  text "AND TOLERANCE ARE IN INCHES AND" at 274.775,314.322 h1.1
  text "DESIGNER:" at 307.812,314.142 h1.2
  text "APPLY TO THE FINISHED PART" at 277.569,312.544 h1.1
  text ".PCB_DESIGNER" at 309.69,312.11 h1.25
  text ".PCB_DESIGNER_APP_DATE" at 347.982,312.11 h1
  text ".pcb_title2" at 364.086,310.468 h2.54
  text "TOLERANCE ON:" at 283.665,309.369 h1.2
  text "ENGINEER:" at 307.812,309.062 h1.2
  text ".PCB_ENGINEER_APP_DATE" at 347.982,307.284 h1
  text "2 DEC. PLACE" at 273.378,307.083 h1
  text "3 DEC. PLACE" at 284.935,307.083 h1
  text "ANGLES" at 298.524,307.083 h1
  text ".PCB_ENGINEER" at 309.69,307.03 h1.25
  text "LICENSE:" at 359.768,306.575 h1.2
  text "CHECKER:" at 307.812,303.982 h1.2
  text ".PCB_2_DEC_TOL" at 274.775,303.146 h1.5
  text ".PCB_3_DEC_TOL" at 285.824,303.146 h1.5
  text ".PCB_ANG_TOL" at 297.635,303.146 h1.5
  text ".prj_license" at 364.336,302.715 h2.54
  text ".PCB_CHECKER_APP_DATE" at 347.932,302.102 h1
  text ".PCB_CHECKER" at 309.69,301.95 h1.25
  text "THIRD ANGLE PROJECTION" at 253.744,301.62 h1
  text "MATERIAL:" at 273.378,299.511 h1.2
  text "LAYER:" at 359.768,298.498 h1.2
  text "REFERENCE DOCUMENTS" at 323.964,298.394 h1.2
  text "BOM:" at 307.812,295.854 h1.2
  text "SEE NOTES" at 282.674,294.457 h1.5
  text "REV:" at 440.25,293.647 h0.8 r270
  text ".DOC_NO_BOM" at 310.44,293.568 h1.5
  text ".prj_pcb" at 438.75,293.397 h1.27 r270
  text "H" at 149.287,291.809 h1.2
  text "ASSY DWG:" at 307.812,291.028 h1.2
  text ".DOC_NO_ASSY_DWG" at 310.44,288.742 h1.5
  text "SIZE:" at 361.292,287.906 h1.2
  text "CAGE CODE:" at 367.515,287.906 h1.2
  text "DWG NO:" at 392.915,287.906 h1.2
  text "REV:" at 432.539,287.906 h1.2
  text "FAB DWG:" at 307.812,286.202 h1.2
  text ".PCB_DWG_NO" at 398.25,284.25 h2.54
  text ".DOC_NO_FAB_DWG" at 310.44,284.043 h1.5
  text "A4" at 361.079,283.98 h2.54
  text ".CAGE_CODE" at 371.833,283.969 h2.54
  text ".prj_pcb" at 433.863,283.98 h2.54
  text "SCHEMATIC:" at 307.812,281.376 h1.2
  text "PRINT DATE:" at 273.175,281.35 h1.2
  text "SCALE:" at 359.768,279.905 h1.2
  text "FILE NAME:" at 375.135,279.903 h1.2
  text "SHEET:" at 419.331,279.903 h1.2
  text ".DOC_NO_SCH_DWG" at 310.44,279.09 h1.5
  text "'.Print_Date', '.Print_Time'" at 275.75,279 h1.5
  text ".PCB_FILE_NAME_NO_PATH" at 383.847,278.76 h1.5
  text ".PCB_SCALE" at 366.626,278.635 h1.5
  text "OF" at 430.761,278.633 h1.2
  text "PAGE FORMAT: /  - A4  210 x 297 /  - A3  297 x 420 /  - A2 420 x 594 /  - A1 597x 841 /  / Change TitleBlock with correct page size.  / Remember to update page size in titleblock!!" at 484,277 h5
  text "DOC-104 REV A" at 151,276.952 h0.55
  text "1" at 170.412,275.809 h1.2
  text "2" at 206.287,275.809 h1.2
  text "3" at 242.162,275.809 h1.2
  text "4" at 278.037,275.809 h1.2
  text "5" at 313.912,275.809 h1.2
  text "6" at 349.787,275.809 h1.2
  text "7" at 385.662,275.809 h1.2
  text "8" at 421.537,275.809 h1.2
  text "REV:" at 504.25,262.272 h0.8
  text "DWG. NO." at 479.689,262.193 h0.8
  text "1" at 162.287,261.809 h1.2
  text "2" at 189.287,261.809 h1.2
  text "3" at 214.287,261.809 h1.2
  text "4" at 239.287,261.809 h1.2
  text "5" at 264.287,261.809 h1.2
  text "6" at 289.287,261.809 h1.2
  text "7" at 314.287,261.809 h1.2
  text "8" at 341.287,261.809 h1.2
  text "9" at 370.287,261.809 h1.2
  text "10" at 395.287,261.809 h1.2
  text "11" at 420.287,261.809 h1.2
  text "12" at 445.287,261.809 h1.2
  text "13" at 470.287,261.809 h1.2
  text "15" at 520.287,261.809 h1.2
  text "16" at 550.287,261.809 h1.2
  text ".prj_pcb" at 504.5,260.772 h1.27
  text ".PCB_DWG_NO" at 483,260.522 h1.27
  text "T" at 151.305,258.183 h1.2
  text "H" at 152.406,258.183 h1.2
  text "I" at 153.676,258.183 h1.2
  text "S" at 154.184,258.183 h1.2
  text "D" at 155.836,258.183 h1.2
  text "O" at 157.106,258.183 h1.2
  text "C" at 158.503,258.183 h1.2
  text "U" at 159.774,258.183 h1.2
  text "M" at 161.044,258.183 h1.2
  text "E" at 162.526,258.183 h1.2
  text "N" at 163.712,258.183 h1.2
  text "T" at 164.939,258.183 h1.2
  text "A" at 166.549,258.183 h1.2
  text "N" at 167.734,258.183 h1.2
  text "D" at 169.004,258.183 h1.2
  text "T" at 170.741,258.183 h1.2
  text "H" at 171.842,258.183 h1.2
  text "E" at 173.112,258.183 h1.2
  text "D" at 174.763,258.183 h1.2
  text "A" at 176.034,258.183 h1.2
  text "T" at 177.219,258.183 h1.2
  text "A" at 178.278,258.183 h1.2
  text "D" at 179.972,258.183 h1.2
  text "I" at 181.242,258.183 h1.2
  text "S" at 181.708,258.183 h1.2
  text "C" at 182.893,258.183 h1.2
  text "L" at 184.164,258.183 h1.2
  text "O" at 185.137,258.183 h1.2
  text "S" at 186.535,258.183 h1.2
  text "E" at 187.72,258.183 h1.2
  text "D" at 188.906,258.183 h1.2
  text "H" at 190.642,258.183 h1.2
  text "E" at 191.912,258.183 h1.2
  text "R" at 193.098,258.183 h1.2
  text "E" at 194.326,258.183 h1.2
  text "I" at 195.512,258.183 h1.2
  text "N" at 196.02,258.183 h1.2
  text "O" at 197.756,258.183 h1.2
  text "R" at 199.153,258.183 h1.2
  text "REVISIONS" at 504.187,257.355 h1.5
  text "H" at 151.305,256.15 h1.2
  text "E" at 152.575,256.15 h1.2
  text "R" at 153.761,256.15 h1.2
  text "E" at 155.031,256.15 h1.2
  text "W" at 156.174,256.15 h1.2
  text "I" at 157.91,256.15 h1.2
  text "T" at 158.376,256.15 h1.2
  text "H" at 159.477,256.15 h1.2
  text "I" at 161.213,256.15 h1.2
  text "S" at 161.721,256.15 h1.2
  text "T" at 163.373,256.15 h1.2
  text "H" at 164.474,256.15 h1.2
  text "E" at 165.744,256.15 h1.2
  text "P" at 167.395,256.15 h1.2
  text "R" at 168.581,256.15 h1.2
  text "O" at 169.851,256.15 h1.2
  text "P" at 171.224,256.15 h1.2
  text "E" at 172.41,256.15 h1.2
  text "R" at 173.595,256.15 h1.2
  text "T" at 174.823,256.15 h1.2
  text "Y" at 175.924,256.15 h1.2
  text "O" at 177.576,256.15 h1.2
  text "F" at 178.931,256.15 h1.2
  text "A" at 180.54,256.15 h1.2
  text "L" at 181.725,256.15 h1.2
  text "T" at 182.657,256.15 h1.2
  text "I" at 183.758,256.15 h1.2
  text "U" at 184.266,256.15 h1.2
  text "M" at 185.536,256.15 h1.2
  text "L" at 187.484,256.15 h1.2
  text "I" at 188.458,256.15 h1.2
  text "M" at 188.966,256.15 h1.2
  text "I" at 190.406,256.15 h1.2
  text "T" at 190.914,256.15 h1.2
  text "E" at 192.015,256.15 h1.2
  text "D" at 193.201,256.15 h1.2
  text "A" at 194.937,256.15 h1.2
  text "N" at 196.122,256.15 h1.2
  text "D" at 197.393,256.15 h1.2
  text "M" at 199.171,256.15 h1.2
  text "A" at 200.653,256.15 h1.2
  text "Y" at 201.796,256.15 h1.2
  text "ZONE" at 463.928,254.18 h1.5
  text "REV" at 472.31,254.18 h1.5
  text "DATE" at 533.778,254.18 h1.5
  text "B" at 151.305,254.118 h1.2
  text "E" at 152.49,254.118 h1.2
  text "F" at 154.184,254.118 h1.2
  text "R" at 155.285,254.118 h1.2
  text "E" at 156.555,254.118 h1.2
  text "E" at 157.699,254.118 h1.2
  text "L" at 158.884,254.118 h1.2
  text "Y" at 159.858,254.118 h1.2
  text "D" at 161.552,254.118 h1.2
  text "I" at 162.822,254.118 h1.2
  text "S" at 163.288,254.118 h1.2
  text "T" at 164.474,254.118 h1.2
  text "R" at 165.557,254.118 h1.2
  text "I" at 166.785,254.118 h1.2
  text "B" at 167.293,254.118 h1.2
  text "U" at 168.479,254.118 h1.2
  text "T" at 169.749,254.118 h1.2
  text "E" at 170.85,254.118 h1.2
  text "D" at 172.036,254.118 h1.2
  text "I" at 173.772,254.118 h1.2
  text "N" at 174.28,254.118 h1.2
  text "W" at 175.974,254.118 h1.2
  text "H" at 177.71,254.118 h1.2
  text "O" at 178.938,254.118 h1.2
  text "L" at 180.335,254.118 h1.2
  text "E" at 181.309,254.118 h1.2
  text "." at 182.495,254.118 h1.2
  text "N" at 183.469,254.118 h1.2
  text "O" at 184.739,254.118 h1.2
  text "R" at 186.644,254.118 h1.2
  text "I" at 187.872,254.118 h1.2
  text "G" at 188.38,254.118 h1.2
  text "H" at 189.778,254.118 h1.2
  text "T" at 191.006,254.118 h1.2
  text "S" at 192.107,254.118 h1.2
  text "A" at 193.758,254.118 h1.2
  text "R" at 194.944,254.118 h1.2
  text "E" at 196.214,254.118 h1.2
  text "DESCRIPTION" at 498.091,254.053 h1.5
  text "APPROVED" at 546.605,254.053 h1.5
  text "R" at 151.305,252.085 h1.2
  text "E" at 152.575,252.085 h1.2
  text "S" at 153.761,252.085 h1.2
  text "E" at 154.946,252.085 h1.2
  text "R" at 156.132,252.085 h1.2
  text "V" at 157.402,252.085 h1.2
  text "E" at 158.588,252.085 h1.2
  text "D" at 159.774,252.085 h1.2
  text "O" at 161.51,252.085 h1.2
  text "R" at 162.907,252.085 h1.2
  text "E" at 164.685,252.085 h1.2
  text "X" at 165.871,252.085 h1.2
  text "P" at 167.014,252.085 h1.2
  text "R" at 168.2,252.085 h1.2
  text "E" at 169.47,252.085 h1.2
  text "S" at 170.656,252.085 h1.2
  text "S" at 171.842,252.085 h1.2
  text "O" at 173.493,252.085 h1.2
  text "R" at 174.89,252.085 h1.2
  text "I" at 176.626,252.085 h1.2
  text "M" at 177.134,252.085 h1.2
  text "P" at 178.617,252.085 h1.2
  text "L" at 179.802,252.085 h1.2
  text "I" at 180.734,252.085 h1.2
  text "E" at 181.242,252.085 h1.2
  text "D" at 182.427,252.085 h1.2
  text "W" at 184.121,252.085 h1.2
  text "A" at 185.857,252.085 h1.2
  text "R" at 187.043,252.085 h1.2
  text "A" at 188.313,252.085 h1.2
  text "N" at 189.499,252.085 h1.2
  text "T" at 190.727,252.085 h1.2
  text "E" at 191.828,252.085 h1.2
  text "E" at 193.013,252.085 h1.2
  text "G" at 194.569,252.085 h1.2
  text "I" at 195.967,252.085 h1.2
  text "V" at 196.475,252.085 h1.2
  text "E" at 197.66,252.085 h1.2
  text "N" at 198.846,252.085 h1.2
  text "." at 200.074,252.085 h1.2
  text "A" at 473.072,250.751 h1.5
  text "ORIGINAL" at 499.996,250.751 h1.5
  text "A" at 149.287,240.809 h1.2
  text "A" at 561.287,240.809 h1.2
  text "B" at 149.287,207.809 h1.2
  text "B" at 561.287,207.809 h1.2
  text "C" at 149.287,171.934 h1.2
  text "C" at 561.287,171.934 h1.2
  text "PCB Build Notes:" at -155.5,156 h3
  text "PCB Build Notes:" at -155.5,156 h3
  text "D" at 149.287,136.059 h1.2
  text "D" at 561.287,136.059 h1.2
  text "1. Layers: '.pcb_layer_count' / 2. Base Material: '.pcb_material' / 3. Plating Finish: '.pcb_finish' / 4. Silkscreen Color: .'.pcb_silkscreen_color' / 5. Solder Color: '.pcb_solder_color'" at -152.3,130.3 h2.5
  text "Other Notes:" at -155.5,123.6 h3
  text "Other Notes:" at -155.5,123.6 h3
  text "A  Differential Pair 90ohm +/- 10%" at -152.15,118.414 h2.5
  text "B  Single Ended 50ohm +/- 10%" at -152.05,113.799 h2.5
  text "C  Differential Pair 100ohm +/- 10%" at -152.15,109.307 h2.5
  text "E" at 149.287,100.184 h1.2
  text "E" at 561.287,100.184 h1.2
  text "Layer" at -150.167,84.863 h1.5
  text "Name" at -141.261,84.863 h1.5
  text "Material" at -121.943,84.863 h1.5
  text "Thickness" at -105.074,84.863 h1.5
  text "Constant" at -91.948,84.863 h1.5
  text "Gerber" at -79.428,84.863 h1.5
  text "Board Layer Stack" at -69.501,84.863 h1.5
  text "Top Overlay" at -141.261,81.863 h1.5
  text "GTO" at -79.428,81.863 h1.5
  text "Top Solder" at -141.261,78.863 h1.5
  text "Solder Resist" at -121.943,78.863 h1.5
  text "0,010mm" at -105.074,78.863 h1.5
  text "3.5" at -91.948,78.863 h1.5
  text "GTS" at -79.428,78.863 h1.5
  text "1" at -150.167,75.863 h1.5
  text "Top Layer" at -141.261,75.863 h1.5
  text "0,035mm" at -105.074,75.863 h1.5
  text "GTL" at -79.428,75.863 h1.5
  text "Dielectric1" at -141.261,72.863 h1.5
  text "IT180A 3310" at -121.943,72.863 h1.5
  text "0,104mm" at -105.074,72.863 h1.5
  text "4.15" at -91.948,72.863 h1.5
  text "2" at -150.167,69.863 h1.5
  text "GND" at -141.261,69.863 h1.5
  text "0,018mm" at -105.074,69.863 h1.5
  text "GP1" at -79.428,69.863 h1.5
  text "Dielectric5" at -141.261,66.863 h1.5
  text "IT180A FR-4" at -121.943,66.863 h1.5
  text "0,130mm" at -105.074,66.863 h1.5
  text "4.25" at -91.948,66.863 h1.5
  text "F" at 149.287,64.309 h1.2
  text "F" at 561.287,64.309 h1.2
  text "3" at -150.167,63.863 h1.5
  text "Inner" at -141.261,63.863 h1.5
  text "0,018mm" at -105.074,63.863 h1.5
  text "G1" at -79.428,63.863 h1.5
  text "Dielectric3" at -141.261,60.863 h1.5
  text "IT180A 3310" at -121.943,60.863 h1.5
  text "0,204mm" at -105.074,60.863 h1.5
  text "4.15" at -91.948,60.863 h1.5
  text "4" at -150.167,57.863 h1.5
  text "Inner2" at -141.261,57.863 h1.5
  text "0,018mm" at -105.074,57.863 h1.5
  text "G2" at -79.428,57.863 h1.5
  text "Dielectric2" at -141.261,54.863 h1.5
  text "IT180A FR-4" at -121.943,54.863 h1.5
  text "0,130mm" at -105.074,54.863 h1.5
  text "4.25" at -91.948,54.863 h1.5
  text "5" at -150.167,51.863 h1.5
  text "Power" at -141.261,51.863 h1.5
  text "0,018mm" at -105.074,51.863 h1.5
  text "GP2" at -79.428,51.863 h1.5
  text "Dielectric4" at -141.261,48.863 h1.5
  text "IT180A 3310" at -121.943,48.863 h1.5
  text "0,104mm" at -105.074,48.863 h1.5
  text "4.15" at -91.948,48.863 h1.5
  text "6" at -150.167,45.863 h1.5
  text "Bottom Layer" at -141.261,45.863 h1.5
  text "0,035mm" at -105.074,45.863 h1.5
  text "GBL" at -79.428,45.863 h1.5
  text "Bottom Solder" at -141.261,42.863 h1.5
  text "Solder Resist" at -121.943,42.863 h1.5
  text "0,010mm" at -105.074,42.863 h1.5
  text "3.5" at -91.948,42.863 h1.5
  text "GBS" at -79.428,42.863 h1.5
  text "Bottom Overlay" at -141.261,39.863 h1.5
  text "GBO" at -79.428,39.863 h1.5
  text "Total board thickness:" at -150.167,36.863 h1.5
  text "0,834mm" at -105.074,36.863 h1.5
  text "PROJECT" at 447.44,28.878 h1.2
  text "DATE" at 472.284,28.878 h1.2
  text ".pcb_organization" at 528.647,28.804 h1.2
  text "G" at 149.287,28.434 h1.2
  text "G" at 561.287,28.434 h1.2
  text "BOARD:" at 428.812,26.846 h1.2
  text ".pcb_address1" at 528.647,26.518 h1.2
  text ".prj_name" at 430.69,24.814 h1.25
  text ".prj_date" at 468.982,24.814 h1
  text ".pcb_address2" at 528.647,24.232 h1.2
  text "'.pcb_address3' - '.pcb_address4'" at 528.647,21.946 h1.2
  text "STATUS:" at 428.812,21.766 h1.2
  text "-  '.prj_status' -" at 430.74,19.336 h1.5
  text "TITLE:" at 480.768,18.951 h1.2
  text "VARIANT:" at 428.812,16.686 h1.2
  text "PART NO." at 393.87,16 h1.2
  text ".prj_part_number" at 406.824,16 h1.2
  text ".prj_name_long" at 485.086,15.141 h2.54
  text ".VariantName" at 430.69,14.086 h1.25
  text "PCB PART NO." at 393.87,13.894 h1.2
  text ".pcb_part_number" at 406.824,13.894 h1.2
  text "DWG. NO." at 561.171,13.207 h0.8 r270
  text "UNLESS OTHERWISE SPECIFIED DIMENSIONS" at 394.378,11.227 h1.1
  text "APPROVALS" at 447.44,11.174 h1.2
  text "DATE" at 472.284,11.174 h1.2
  text ".pcb_title1" at 485.086,9.968 h2.54
  text ".PCB_DWG_NO" at 559.5,9.897 h1.27 r270
  text "AND TOLERANCE ARE IN INCHES AND" at 395.775,9.322 h1.1
  text "DESIGNER:" at 428.812,9.142 h1.2
  text "APPLY TO THE FINISHED PART" at 398.569,7.544 h1.1
  text ".PCB_DESIGNER" at 430.69,7.11 h1.25
  text ".PCB_DESIGNER_APP_DATE" at 468.982,7.11 h1
  text ".pcb_title2" at 485.086,5.468 h2.54
  text "TOLERANCE ON:" at 404.665,4.369 h1.2
  text "ENGINEER:" at 428.812,4.062 h1.2
  text ".PCB_ENGINEER_APP_DATE" at 468.982,2.284 h1
  text "2 DEC. PLACE" at 394.378,2.083 h1
  text "3 DEC. PLACE" at 405.935,2.083 h1
  text "ANGLES" at 419.524,2.083 h1
  text ".PCB_ENGINEER" at 430.69,2.03 h1.25
  text "LICENSE:" at 480.768,1.575 h1.2
  text "CHECKER:" at 428.812,-1.018 h1.2
  text ".PCB_2_DEC_TOL" at 395.775,-1.854 h1.5
  text ".PCB_3_DEC_TOL" at 406.824,-1.854 h1.5
  text ".PCB_ANG_TOL" at 418.635,-1.854 h1.5
  text ".prj_license" at 485.336,-2.285 h2.54
  text ".PCB_CHECKER_APP_DATE" at 468.932,-2.898 h1
  text ".PCB_CHECKER" at 430.69,-3.05 h1.25
  text "THIRD ANGLE PROJECTION" at 374.744,-3.38 h1
  text "MATERIAL:" at 394.378,-5.489 h1.2
  text "LAYER:" at 480.768,-6.502 h1.2
  text "REFERENCE DOCUMENTS" at 444.964,-6.606 h1.2
  text "H" at 149.287,-7.441 h1.2
  text "BOM:" at 428.812,-9.146 h1.2
  text "SEE NOTES" at 403.674,-10.543 h1.5
  text "REV:" at 561.25,-11.353 h0.8 r270
  text ".DOC_NO_BOM" at 431.44,-11.432 h1.5
  text ".prj_pcb" at 559.75,-11.603 h1.27 r270
  text "ASSY DWG:" at 428.812,-13.972 h1.2
  text ".DOC_NO_ASSY_DWG" at 431.44,-16.258 h1.5
  text "SIZE:" at 482.292,-17.094 h1.2
  text "CAGE CODE:" at 488.515,-17.094 h1.2
  text "DWG NO:" at 513.915,-17.094 h1.2
  text "REV:" at 553.539,-17.094 h1.2
  text "FAB DWG:" at 428.812,-18.798 h1.2
  text ".PCB_DWG_NO" at 519.25,-20.75 h2.54
  text ".DOC_NO_FAB_DWG" at 431.44,-20.957 h1.5
  text "A3" at 482.14,-21.02 h2.54
  text ".CAGE_CODE" at 492.833,-21.031 h2.54
  text ".prj_pcb" at 554.863,-21.02 h2.54
  text "SCHEMATIC:" at 428.812,-23.624 h1.2
  text "PRINT DATE:" at 394.175,-23.65 h1.2
  text "SCALE:" at 480.768,-25.095 h1.2
  text "FILE NAME:" at 496.135,-25.097 h1.2
  text "SHEET:" at 540.331,-25.097 h1.2
  text ".DOC_NO_SCH_DWG" at 431.44,-25.91 h1.5
  text "'.Print_Date', '.Print_Time'" at 396.75,-26 h1.5
  text ".PCB_FILE_NAME_NO_PATH" at 504.847,-26.24 h1.5
  text ".PCB_SCALE" at 487.626,-26.365 h1.5
  text "OF" at 551.761,-26.367 h1.2
  text "DOC-104 REV A" at 151,-28.048 h0.55
  text "1" at 162.287,-29.191 h1.2
  text "2" at 189.287,-29.191 h1.2
  text "3" at 214.287,-29.191 h1.2
  text "4" at 239.287,-29.191 h1.2
  text "5" at 264.287,-29.191 h1.2
  text "6" at 289.287,-29.191 h1.2
  text "7" at 314.287,-29.191 h1.2
  text "8" at 341.287,-29.191 h1.2
  text "9" at 370.287,-29.191 h1.2
  text "10" at 395.287,-29.191 h1.2
  text "11" at 420.287,-29.191 h1.2
  text "12" at 445.287,-29.191 h1.2
  text "13" at 470.287,-29.191 h1.2
  text "14" at 495.287,-29.191 h1.2
  text "15" at 520.287,-29.191 h1.2
  text "16" at 550.287,-29.191 h1.2
Route Tool Path:
  the board outline again, w0.3
V Cut:
  region: 55,129 58,127.5 61.125,130.625 58,122
  lines w0.25: 58,122 61.125,130.625 ; 58,122 58,127.5 ; 58,122 55,129 58,127.5 ; 58,127.5 61.125,130.625 ; 58,127.5 61.125,130.625
  lines w0.35: 0,5 129,5 ; 0,94 129,94
  lines w0.5: 64.5,-18.5 64.5,118
  lines w0.55: 58,118 58,142.5
  text "V-CUT" at 50,115 h5 r90
Outline Panel:
  the board outline again, w0.1

## Panel: embedded boards
"display.PcbDoc" at 64.5,5, 1 rows x 1 columns, spacing 63.5 x 38.1, rotation 90